# Altium PCB PCB.PcbDoc (part 2 of 2)
Units mm, origin at the board's own origin, x right, y up, seen from the top; angles counter-clockwise.
Board outline 100 x 100 mm, 2 copper layers (Top Layer, Bottom Layer); 45 components, 90 nets, 459 pads, 167 vias.
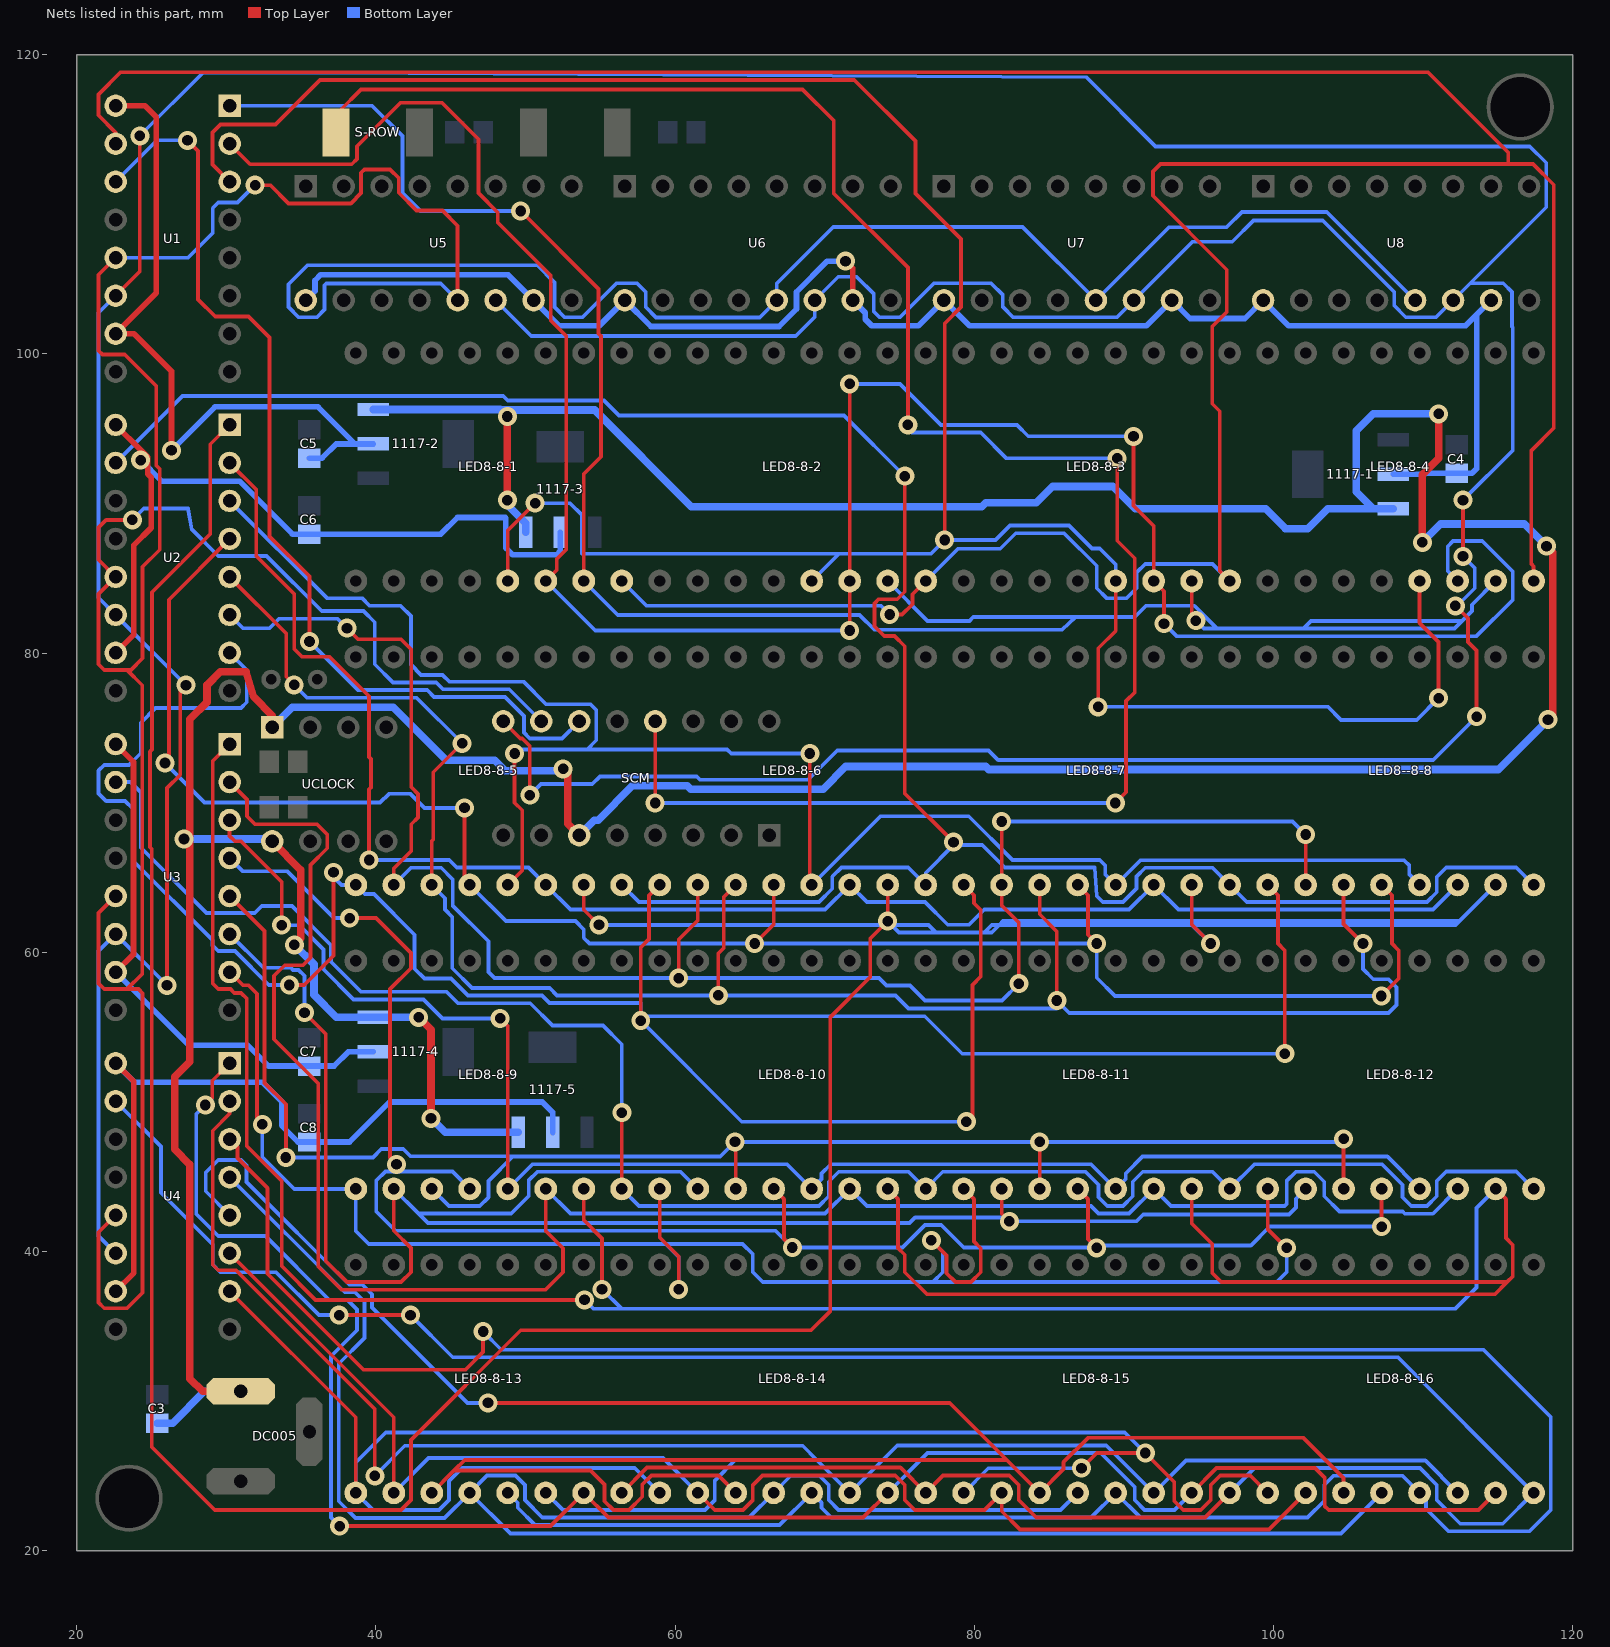
[diagram p2: the nets of this part, all layers, seen from the top]

## Via types
v1: diameter 1.27, hole 0.711, Top Layer to Bottom Layer, 167 vias

## Nets (pads, with @x,y where several pads share a name; then routed paths per layer and width w, separated by ;. In a path a pad name is that pad's centre, name@x,y a point inside that pad or via, vN(x,y) a via of type N, cw(c..) or ccw(c..) an arc to the next point about the centre after c; other vN are vias at no path point) (continued)
ROW5: LED8-8-1.5 LED8-8-2.5 LED8-8-3.5 LED8-8-4.5 U1.3 | length 176.5
  Top Layer w0.254: U1.3@30.226,111.506 29.083,112.649 29.083,114.808 29.616,115.341 33.299,115.341 36.271,118.313 71.984,118.313 76.073,114.224 76.073,110.719 79.121,107.671 79.121,103.124 78.029,102.032 v1(78.029,87.554) ; LED8-8-1.5@48.818,84.817 48.818,88.188 v1(50.648,90.018) ; v1(88.29,76.403) 88.29,80.315 89.458,81.483 LED8-8-3.5@89.458,84.817 ; LED8-8-4.5@109.778,84.817 109.778,82.017 111.049,80.747 v1(111.049,76.987)
  Bottom Layer w0.254: v1(50.648,90.018) 52.984,90.018 53.772,89.23 53.772,86.639 70.961,86.639 ; LED8-8-2.5@69.138,84.817 70.961,86.639 ; v1(88.29,76.403) 103.643,76.403 104.525,75.521 109.583,75.521 v1(111.049,76.987) ; LED8-8-3.5@89.458,84.817 89.458,85.929 88.392,86.995 87.871,86.995 86.347,88.519 82.398,88.519 81.432,87.554 v1(78.029,87.554) 77.114,86.639 70.961,86.639
ROW6: LED8-8-1.6 LED8-8-2.6 LED8-8-3.6 LED8-8-4.6 U1.2 | length 159.4
  Top Layer w0.254: U1.2@30.226,114.046 31.598,112.674 38.391,112.674 38.747,113.03 38.747,113.88 41.656,116.789 44.425,116.789 46.863,114.351 46.863,110.744 48.15,109.457 48.15,108.771 51.689,105.232 51.689,102.235 52.73,101.194 52.73,86.919 52.091,86.279 52.091,85.55 LED8-8-1.6@51.358,84.817 ; v1(71.678,81.509) LED8-8-2.6@71.678,84.817 ; LED8-8-2.6@71.678,84.817 v1(71.679,97.993) ; v1(90.653,94.488) 90.653,89.84 91.998,88.494 LED8-8-3.6@91.998,84.817 92.685,84.131 v1(92.685,81.966)
  Bottom Layer w0.254: LED8-8-1.6@51.358,84.817 54.667,81.509 v1(71.678,81.509) ; v1(71.679,97.993) 75.031,97.993 77.774,95.25 82.855,95.25 83.617,94.488 v1(90.653,94.488) ; v1(92.685,81.966) 93.523,81.128 113.589,81.128 116.002,83.541 116.002,85.446 113.963,87.484 112.014,87.484 111.658,87.128 111.658,85.477 LED8-8-4.6@112.318,84.817
ROW7: LED8-8-1.7 LED8-8-2.7 LED8-8-3.7 LED8-8-4.7 U1.1 | length 146.2
  Top Layer w0.254: v1(49.682,109.55) 54.889,104.343 54.889,101.346 55.042,101.194 55.042,93.116 53.898,91.973 LED8-8-1.7@53.898,84.817 ; LED8-8-3.7@94.538,84.817 94.538,82.449 v1(94.818,82.169)
  Bottom Layer w0.254: U1.1@30.226,116.586 39.751,116.586 41.783,114.554 41.783,110.744 42.977,109.55 v1(49.682,109.55) ; LED8-8-1.7@53.898,84.817 56.172,82.543 72.342,82.543 73.33,81.556 85.868,81.556 86.798,82.404 ; LED8-8-2.7@74.218,84.817 76.885,82.15 79.68,82.15 79.934,82.404 86.798,82.404 ; v1(94.818,82.169) 95.352,81.636 96.241,81.636 ; LED8-8-4.7@114.858,84.817 113.273,83.232 113.273,82.804 112.613,82.144 ; 86.798,82.404 90.735,82.404 90.735,82.486 90.817,82.486 91.491,83.16 94.717,83.16 95.263,82.614 96.241,81.636 ; 96.241,81.636 102.006,81.636 ; 102.006,81.636 102.514,82.144 112.613,82.144 ; 102.006,81.636 112.105,81.636 112.613,82.144
ROW8: LED8-8-1.8 LED8-8-2.8 LED8-8-3.8 LED8-8-4.8 U1.15 | length 235.6
  Top Layer w0.254: U1.15@22.606,114.046 22.606,114.808 21.463,115.951 21.463,117.348 22.936,118.821 110.338,118.821 115.697,113.462 115.697,112.7 ; v1(74.346,82.575) 75.184,82.575 75.87,83.261 75.87,83.929 LED8-8-2.8@76.758,84.817 ; LED8-8-3.8@97.078,84.817 96.418,85.477 96.418,96.159 95.91,96.667 95.91,101.829 96.889,102.807 96.889,105.625 91.948,110.566 91.948,112.192 92.456,112.7 115.697,112.7 ; LED8-8-4.8@117.398,84.817 117.398,85.802 117.246,85.954 117.246,93.548 118.745,95.047 118.745,111.303 117.348,112.7 115.697,112.7
  Bottom Layer w0.254: LED8-8-1.8@56.438,84.817 58.096,83.16 73.762,83.16 v1(74.346,82.575) ; LED8-8-2.8@76.758,84.817 78.917,86.976 81.744,86.976 82.779,88.011 86.011,88.011 88.189,85.833 88.189,84.328 88.849,83.668 90.195,83.668 90.855,84.328 90.855,85.375 91.44,85.96 95.935,85.96 LED8-8-3.8@97.078,84.817
ROW9: LED8-8-5.1 LED8-8-6.1 LED8-8-7.1 LED8--8-8.1 U2.7 | length 181.6
  Top Layer w0.254: v1(34.214,57.81) 35.219,57.81 37.167,59.759 v1(37.167,65.336) ; v1(57.709,55.423) 57.709,60.325 58.268,60.884 58.268,63.786 LED8-8-6.1@58.978,64.497 ; LED8-8-7.1@79.298,64.497 79.985,63.811 79.985,63.277 80.441,62.82 80.441,58.369 79.883,57.811 79.883,49.073 v1(79.477,48.666) ; LED8--8-8.1@99.618,64.497 100.305,63.811 100.305,60.579 100.762,60.122 v1(100.762,53.213)
  Bottom Layer w0.254: U2.7@30.226,80.01 31.369,78.867 31.369,76.708 30.988,76.327 25.273,76.327 24.279,75.333 24.279,73.301 23.495,72.517 21.844,72.517 21.463,72.136 21.463,70.612 21.971,70.104 23.241,70.104 23.749,69.596 23.749,66.139 29.083,60.805 29.083,60.452 29.464,60.071 30.582,60.071 32.842,57.81 v1(34.214,57.81) ; v1(37.167,65.336) 37.167,65.024 37.694,64.497 LED8-8-5.1@38.658,64.497 39.268,63.887 39.87,63.887 42.592,61.166 42.592,58.894 43.244,58.242 45.022,58.242 46.165,57.099 51.117,57.099 51.612,56.605 57.709,56.605 v1(57.709,55.423) ; v1(79.477,48.666) 64.465,48.666 v1(57.709,55.423) ; v1(100.762,53.213) 79.204,53.213 76.697,55.721 58.007,55.721 v1(57.709,55.423)
ROW10: LED8-8-5.2 LED8-8-6.2 LED8-8-7.2 LED8--8-8.2 U2.6 | length 121
  Top Layer w0.254: v1(38.075,81.661) 38.811,80.924 41.681,80.924 42.367,80.239 42.367,71.044 42.824,70.587 42.824,69.012 42.367,68.555 42.367,66.769 41.198,65.6 LED8-8-5.2@41.198,64.497 ; v1(60.249,58.268) 60.249,60.858 61.518,62.128 LED8-8-6.2@61.518,64.497 ; v1(81.838,68.739) LED8-8-7.2@81.838,64.497 81.838,63.12 82.982,61.976 v1(82.982,57.893) ; LED8--8-8.2@102.158,64.497 v1(102.158,67.869)
  Bottom Layer w0.254: U2.6@30.226,82.55 31.115,81.661 32.893,81.661 33.528,82.296 37.44,82.296 v1(38.075,81.661) ; LED8-8-5.2@41.198,64.497 42.341,65.64 44.367,65.64 45.135,64.872 45.135,63.12 47.523,60.731 47.523,58.674 47.93,58.268 v1(60.249,58.268) 73.637,58.268 74.139,57.766 75.711,57.766 76.708,56.769 81.858,56.769 v1(82.982,57.893) ; v1(81.838,68.739) 101.289,68.739 v1(102.158,67.869)
ROW11: LED8-8-5.3 LED8-8-6.3 LED8-8-7.3 LED8--8-8.3 U2.5 | length 129.8
  Top Layer w0.254: U2.5@30.226,85.09 34.011,81.305 34.011,78.41 v1(34.544,77.876) ; LED8-8-5.3@43.738,64.497 43.738,67.436 43.84,67.539 43.84,72.034 v1(45.771,73.965) ; v1(62.89,57.113) 62.89,59.903 63.261,60.273 63.261,63.7 LED8-8-6.3@64.058,64.497 ; LED8-8-7.3@84.378,64.497 84.378,62.535 85.522,61.392 v1(85.522,56.769) ; LED8--8-8.3@104.698,64.497 104.698,61.875 v1(105.994,60.579)
  Bottom Layer w0.254: v1(34.544,77.876) 35.406,77.014 42.722,77.014 v1(45.771,73.965) ; LED8-8-5.3@43.738,64.497 44.627,63.608 44.627,62.846 45.11,62.363 45.11,58.928 46.431,57.607 51.625,57.607 52.12,57.113 v1(62.89,57.113) 74.744,57.113 75.615,56.242 85.522,56.242 v1(85.522,56.769) 86.36,55.931 107.696,55.931 108.229,56.464 108.229,57.658 107.696,58.191 106.68,58.191 105.994,58.877 v1(105.994,60.579)
ROW12: LED8-8-5.4 LED8-8-6.4 LED8-8-7.4 LED8--8-8.4 U2.4 | length 126.8
  Top Layer w0.254: v1(25.908,72.644) 26.162,72.898 26.162,83.566 U2.4@30.226,87.63 ; v1(45.923,69.647) 45.923,64.852 LED8-8-5.4@46.278,64.497 ; v1(65.329,60.579) 66.598,61.848 LED8-8-6.4@66.598,64.497 ; LED8-8-7.4@86.918,64.497 87.605,63.811 87.605,61.163 v1(88.189,60.579) ; v1(107.213,57.074) 108.381,58.242 108.381,60.122 107.925,60.579 107.925,63.811 LED8--8-8.4@107.238,64.497
  Bottom Layer w0.254: v1(25.908,72.644) 28.55,70.002 40.284,70.002 40.869,70.587 42.316,70.587 43.256,69.647 v1(45.923,69.647) ; LED8-8-5.4@46.278,64.497 48.698,62.078 53.34,62.078 53.899,61.519 53.899,60.96 54.28,60.579 v1(65.329,60.579) v1(88.189,60.579) 88.189,58.293 89.408,57.074 v1(107.213,57.074)
ROW13: LED8-8-5.5 LED8-8-6.5 LED8-8-7.5 LED8--8-8.5 U2.3 | length 119.8
  Top Layer w0.254: LED8-8-5.5@48.818,64.497 49.784,65.463 49.784,69.484 49.276,69.992 v1(49.276,73.279) ; v1(69.012,73.279) 69.012,64.623 LED8-8-6.5@69.138,64.497
  Bottom Layer w0.254: U2.3@30.226,90.17 36.728,83.668 39.065,83.668 39.573,83.16 41.656,83.16 42.342,82.474 42.342,79.223 43.026,78.538 44.45,78.538 44.902,78.086 49.879,78.086 51.384,76.581 54.356,76.581 54.737,76.2 54.737,74.168 54.127,73.558 ; v1(49.276,73.279) 49.555,73.558 54.127,73.558 ; v1(69.012,73.279) 63.764,73.279 63.485,73.558 54.127,73.558 ; LED8-8-6.5@69.138,64.497 73.729,69.088 79.635,69.088 82.556,66.167 88.392,66.167 88.766,65.793 88.766,65.189 LED8-8-7.5@89.458,64.497 91.109,66.148 108.728,66.148 109.09,65.786 109.09,65.185 LED8--8-8.5@109.778,64.497
ROW14: LED8-8-5.6 LED8-8-6.6 LED8-8-7.6 LED8--8-8.6 U2.2 | length 110
  Top Layer w0.254: U2.2@30.226,92.71 32.004,90.932 32.004,86.487 34.544,83.947 34.544,80.264 35.052,79.756 36.906,79.756 39.548,77.114 39.548,73.05 39.675,72.923 39.675,71.018 39.548,70.891 v1(39.548,66.167)
  Bottom Layer w0.254: v1(39.548,66.167) 44.903,66.167 45.411,65.659 50.196,65.659 LED8-8-5.6@51.358,64.497 53.009,62.846 70.027,62.846 LED8-8-6.6@71.678,64.497 72.828,63.348 76.714,63.348 78.232,61.83 79.654,61.83 80.67,62.846 90.347,62.846 LED8-8-7.6@91.998,64.497 93.649,62.846 110.667,62.846 LED8--8-8.6@112.318,64.497
ROW15: LED8-8-5.7 LED8-8-6.7 LED8-8-7.7 LED8--8-8.7 U2.1 | length 262.4
  Top Layer w0.254: U2.1@30.226,95.25 28.931,93.955 28.931,87.96 25.031,84.061 25.031,73.545 24.892,73.406 24.892,67.032 25.019,66.905 25.019,26.924 29.235,22.708 41.681,22.708 42.342,23.368 42.342,27.381 49.682,34.722 69.088,34.722 70.383,36.017 70.383,55.677 73.05,58.344 73.05,60.935 73.075,60.935 v1(74.218,62.078) LED8-8-6.7@74.218,64.497 ; LED8-8-5.7@53.898,64.497 53.898,62.84 v1(54.915,61.824) ; LED8-8-7.7@94.538,64.497 94.538,61.85 v1(95.809,60.579)
  Bottom Layer w0.254: v1(54.915,61.824) 74.218,61.824 v1@74.472,61.824 ; v1(74.218,62.078) v1@74.472,61.824 ; v1(95.809,60.579) 94.564,61.824 ; LED8--8-8.7@114.858,64.497 112.439,62.078 ; v1@74.472,61.824 74.974,61.322 77.445,61.322 ; v1@74.472,61.824 76.943,61.824 77.445,61.322 ; 77.445,61.322 80.677,61.322 ; 80.677,61.322 81.178,61.322 81.68,61.824 ; 80.677,61.322 81.178,61.824 81.68,61.824 ; 81.68,61.824 94.564,61.824 ; 81.68,61.824 81.934,62.078 94.31,62.078 ; 94.31,62.078 112.439,62.078 ; 94.31,62.078 94.564,61.824 ; 94.564,61.824 112.185,61.824 112.439,62.078
ROW16: LED8-8-5.8 LED8-8-6.8 LED8-8-7.8 LED8--8-8.8 U2.15 | length 157.5
  Top Layer w0.254: v1(75.362,91.821) 75.362,84.099 74.854,83.591 73.609,83.591 73.33,83.312 73.33,81.788 73.984,81.134 74.676,81.134 75.362,80.448 75.362,70.612 v1(78.613,67.361)
  Bottom Layer w0.254: U2.15@22.606,92.71 27.076,97.18 48.52,97.18 48.818,96.882 55.261,96.882 56.258,95.885 71.298,95.885 v1(75.362,91.821) ; LED8-8-5.8@56.438,64.497 57.581,63.354 69.628,63.354 70.51,64.237 70.51,65.049 71.12,65.659 75.596,65.659 LED8-8-6.8@76.758,64.497 76.758,65.303 v1@78.613,67.158 ; v1(78.613,67.361) v1@78.613,67.158 ; LED8--8-8.8@117.398,64.497 116.236,65.659 111.557,65.659 110.922,65.024 110.922,64.008 110.268,63.354 98.221,63.354 LED8-8-7.8@97.078,64.497 95.935,65.64 91.44,65.64 90.855,65.055 90.855,64.261 89.948,63.354 88.589,63.354 88.189,63.754 88.062,65.659 82.042,65.659 80.543,67.158 v1@78.613,67.158
ROW17: LED8-8-9.1 LED8-8-10.1 LED8-8-11.1 LED8-8-12.1 U3.7 | length 119.6
  Top Layer w0.254: U3.7@30.226,58.674 31.115,57.785 31.496,57.785 32.055,57.226 32.055,48.844 v1(32.41,48.489) ; LED8-8-10.1@58.978,44.177 58.978,40.92 60.249,39.649 v1(60.249,37.465) ; v1(77.14,40.742) 78.155,39.726 78.155,38.539 78.74,37.954 79.787,37.954 80.441,38.608 80.441,40.209 79.985,40.665 79.985,43.491 LED8-8-11.1@79.298,44.177 ; LED8-8-12.1@99.618,44.177 99.618,41.504 v1(100.889,40.234)
  Bottom Layer w0.254: v1(32.41,48.489) 32.41,46.311 34.544,44.177 LED8-8-9.1@38.658,44.177 38.658,41.352 39.522,40.488 59.385,40.488 ; v1(60.249,37.465) 60.249,39.624 59.385,40.488 ; v1(77.14,40.742) 77.902,39.98 77.902,38.608 77.241,37.948 ; v1(100.889,40.234) 100.889,38.608 100.228,37.948 77.241,37.948 ; 59.385,40.488 64.516,40.488 65.202,39.802 65.202,38.608 65.862,37.948 77.241,37.948
ROW18: LED8-8-9.2 LED8-8-10.2 LED8-8-11.2 LED8-8-12.2 U3.6 | length 125.1
  Top Layer w0.254: v1(35.23,55.956) 36.652,54.534 36.652,39.362 38.066,37.948 41.681,37.948 42.341,38.608 42.341,40.234 41.198,41.377 LED8-8-9.2@41.198,44.177 ; LED8-8-11.2@81.838,44.177 81.838,42.52 v1(82.347,42.012)
  Bottom Layer w0.254: U3.6@30.226,61.214 32.483,58.957 34.323,58.957 34.461,58.819 34.831,58.819 35.23,58.42 v1(35.23,55.956) ; LED8-8-9.2@41.198,44.177 42.849,42.526 ; LED8-8-10.2@61.518,44.177 60.375,45.32 50.8,45.32 50.215,44.735 50.215,43.688 49.053,42.526 42.849,42.526 ; LED8-8-12.2@102.158,44.177 101.504,43.523 101.504,42.926 101.047,42.469 91.307,42.469 90.849,42.012 v1(82.347,42.012) 82.086,42.272 76.053,42.272 75.672,41.891 43.484,41.891 42.849,42.526
ROW19: LED8-8-9.3 LED8-8-10.3 LED8-8-11.3 LED8-8-12.3 U3.5 | length 122.1
  Top Layer w0.254: U3.5@30.226,63.754 32.563,61.417 32.563,51.257 33.985,49.835 v1(33.985,46.279) ; v1(64.008,47.32) 64.058,47.27 LED8-8-10.3@64.058,44.177 ; LED8-8-11.3@84.378,44.177 v1(84.378,47.32) ; LED8-8-12.3@104.698,44.177 v1(104.698,47.524)
  Bottom Layer w0.254: v1(33.985,46.279) 39.801,46.279 40.366,46.844 41.833,46.844 42.322,46.355 63.043,46.355 ; LED8-8-9.3@43.738,44.177 44.881,43.034 46.946,43.034 47.523,43.612 47.523,44.704 49.155,46.336 63.024,46.336 63.043,46.355 ; v1(104.698,47.524) 104.494,47.32 v1(84.378,47.32) v1(64.008,47.32) 63.043,46.355
ROW20: LED8-8-9.4 LED8-8-10.4 LED8-8-11.4 LED8-8-12.4 U3.4 | length 120.9
  Top Layer w0.254: v1(38.252,62.281) 40.005,62.281 42.342,59.944 42.342,58.928 40.945,57.531 40.945,46.253 v1(41.377,45.822) ; LED8-8-10.4@66.598,44.177 67.285,43.491 67.285,40.818 v1(67.843,40.259) ; LED8-8-11.4@86.918,44.177 87.605,43.491 87.605,40.818 v1(88.189,40.234) ; v1(107.238,41.655) LED8-8-12.4@107.238,44.177
  Bottom Layer w0.254: U3.4@30.226,66.294 31.115,65.405 34.087,65.405 37.211,62.281 v1(38.252,62.281) ; v1(41.377,45.822) 41.859,45.339 ; LED8-8-9.4@46.278,44.177 45.116,45.339 41.859,45.339 ; v1(107.238,41.655) 99.764,41.655 98.494,40.386 88.189,40.386 v1(88.189,40.234) 88.163,40.259 79.299,40.259 77.8,41.758 76.708,41.758 75.209,40.259 v1(67.843,40.259) 66.719,41.383 41.319,41.383 40.03,42.672 40.03,44.729 40.64,45.339 41.377,45.339 41.859,45.339
ROW21: LED8-8-9.5 LED8-8-10.5 LED8-8-11.5 LED8-8-12.5 U3.3 | length 104.2
  Top Layer w0.254: U3.3@30.226,68.834 30.226,67.767 30.582,67.412 30.988,67.412 33.706,64.694 v1(33.706,61.803) ; v1(48.31,55.575) 48.818,55.067 LED8-8-9.5@48.818,44.177
  Bottom Layer w0.254: v1(33.706,61.803) 34.886,61.803 36.5,60.189 36.5,58.858 38.513,56.845 43.18,56.845 44.45,55.575 v1(48.31,55.575) ; LED8-8-9.5@48.818,44.177 50.469,45.828 67.487,45.828 LED8-8-10.5@69.138,44.177 69.8,44.839 69.8,45.212 70.416,45.828 87.807,45.828 LED8-8-11.5@89.458,44.177 90.128,44.847 90.128,45.212 91.252,46.336 107.619,46.336 LED8-8-12.5@109.778,44.177
ROW22: LED8-8-9.6 LED8-8-10.6 LED8-8-11.6 LED8-8-12.6 U3.2 | length 132.9
  Top Layer w0.254: U3.2@30.226,71.374 31.394,70.206 31.394,69.088 31.928,68.555 36.068,68.555 36.754,67.869 36.754,66.954 35.624,65.824 35.624,59.632 35.123,59.131 33.909,59.131 33.198,58.42 33.198,54.178 36.144,51.232 36.144,38.989 37.694,37.44 51.333,37.44 52.501,38.608 52.501,40.209 51.358,41.352 LED8-8-9.6@51.358,44.177
  Bottom Layer w0.254: LED8-8-9.6@51.358,44.177 53.009,42.526 70.027,42.526 LED8-8-10.6@71.678,44.177 72.828,43.028 87.807,43.028 88.309,42.526 90.347,42.526 LED8-8-11.6@91.998,44.177 93.148,43.028 100.755,43.028 100.889,43.161 100.889,44.704 101.505,45.32 102.737,45.32 103.403,44.653 103.403,43.688 104.419,42.672 108.636,42.672 108.788,42.52 110.661,42.52 LED8-8-12.6@112.318,44.177
ROW23: LED8-8-9.7 LED8-8-10.7 LED8-8-11.7 LED8-8-12.7 U3.1 | length 216.1
  Top Layer w0.254: U3.1@30.226,73.914 29.095,72.783 29.095,57.9 29.464,57.531 30.277,57.531 30.531,57.277 30.988,57.277 31.369,56.896 31.369,47.041 33.706,44.704 33.706,39.014 35.966,36.754 v1(53.95,36.754) ; LED8-8-9.7@53.898,44.177 53.898,42.088 55.118,40.869 v1(55.118,37.465) ; LED8-8-10.7@74.218,44.177 74.905,43.491 74.905,40.234 75.362,39.776 75.362,38.608 76.835,37.135 114.808,37.135 115.621,37.948 ; LED8-8-11.7@94.538,44.177 94.538,41.86 95.91,40.488 95.91,38.557 96.52,37.948 115.621,37.948 ; LED8-8-12.7@114.858,44.177 115.545,43.491 115.545,40.894 116.002,40.437 116.002,38.329 115.621,37.948
  Bottom Layer w0.254: v1(53.95,36.754) 54.534,36.17 56.413,36.17 ; v1(55.118,37.465) 56.413,36.17 ; LED8-8-12.7@114.858,44.177 113.589,42.908 113.589,37.592 112.166,36.17 56.413,36.17
ROW24: LED8-8-9.8 LED8-8-10.8 LED8-8-11.8 LED8-8-12.8 U3.15 | length 125.6
  Top Layer w0.254: LED8-8-9.8@56.438,44.177 v1(56.439,49.276)
  Bottom Layer w0.254: U3.15@22.606,71.374 23.599,71.374 24.308,70.665 24.308,66.98 28.677,62.611 31.902,62.611 32.372,63.081 34.395,63.081 37.008,60.468 37.008,59.36 39.014,57.353 44.729,57.353 45.491,56.591 50.317,56.591 51.816,55.093 55.194,55.093 56.439,53.848 v1(56.439,49.276) ; LED8-8-9.8@56.438,44.177 57.581,43.034 69.628,43.034 70.282,43.688 70.282,44.653 70.949,45.32 75.615,45.32 LED8-8-10.8@76.758,44.177 77.901,45.32 87.446,45.32 88.315,44.451 88.315,43.619 88.9,43.034 89.947,43.034 90.601,43.688 90.601,44.653 91.269,45.32 95.935,45.32 LED8-8-11.8@97.078,44.177 98.729,45.828 107.258,45.828 108.635,44.451 108.635,43.619 109.22,43.034 110.267,43.034 110.921,43.688 110.921,44.704 111.556,45.339 116.236,45.339 LED8-8-12.8@117.398,44.177
ROW25: LED8-8-13.1 LED8-8-14.1 LED8-8-15.1 LED8-8-16.1 U4.7 | length 122.4
  Top Layer w0.254: U4.7@30.226,37.338 38.658,28.906 LED8-8-13.1@38.658,23.857 ; v1(87.173,25.502) 88.189,26.518 v1(91.44,26.518) 93.37,24.587 93.37,23.317 93.98,22.708 95.148,22.708 95.809,23.368 95.809,24.384 96.444,25.019 98.456,25.019 LED8-8-16.1@99.618,23.857
  Bottom Layer w0.254: LED8-8-14.1@58.978,23.857 57.308,25.527 45.771,25.527 44.882,24.638 44.882,23.368 44.221,22.708 39.808,22.708 LED8-8-13.1@38.658,23.857 38.658,25.88 40.667,27.889 90.068,27.889 v1(91.44,26.518) ; LED8-8-15.1@79.298,23.857 80.943,25.502 v1(87.173,25.502)
ROW26: LED8-8-13.2 LED8-8-14.2 LED8-8-15.2 LED8-8-16.2 U4.6 | length 90.3
  Top Layer w0.254: U4.6@30.226,39.878 41.198,28.906 LED8-8-13.2@41.198,23.857 ; LED8-8-14.2@61.518,23.857 62.661,22.714 64.548,22.714 65.202,23.368 65.202,24.384 65.837,25.019 74.727,25.019 75.362,24.384 75.362,23.368 76.022,22.708 80.689,22.708 LED8-8-15.2@81.838,23.857 81.838,22.632 83.058,21.412 99.713,21.412 LED8-8-16.2@102.158,23.857
  Bottom Layer w0.254: LED8-8-13.2@41.198,23.857 43.529,26.187 59.188,26.187 LED8-8-14.2@61.518,23.857
ROW27: LED8-8-13.3 LED8-8-14.3 LED8-8-15.3 LED8-8-16.3 U4.5 | length 156
  Top Layer w0.254: LED8-8-13.3@43.738,23.857 45.23,25.349 ; v1(47.498,29.87) 78.365,29.87 82.175,26.06 ; LED8-8-14.3@64.058,23.857 62.896,25.019 58.42,25.019 57.81,24.409 57.81,23.597 56.928,22.714 55.88,22.714 55.295,23.299 55.295,24.41 54.356,25.349 45.23,25.349 ; LED8-8-16.3@104.698,23.857 104.698,24.855 102.02,27.534 87.6,27.534 85.975,25.908 85.975,25.454 LED8-8-15.3@84.378,23.857 82.175,26.06 ; 45.23,25.349 45.942,26.06 82.175,26.06
  Bottom Layer w0.254: U4.5@30.226,42.418 28.626,44.018 28.626,45.263 29.464,46.101 30.988,46.101 31.357,45.732 31.357,44.64 38.227,37.77 39.116,37.77 39.751,37.135 39.751,36.246 46.126,29.87 v1(47.498,29.87)
ROW28: LED8-8-13.4 LED8-8-14.4 LED8-8-15.4 LED8-8-16.4 U4.4 | length 145.7
  Bottom Layer w0.254: U4.4@30.226,44.958 37.922,37.262 38.608,37.262 39.243,36.627 39.243,34.214 37.515,32.486 37.515,23.292 38.633,22.174 44.595,22.174 LED8-8-13.4@46.278,23.857 ; LED8-8-15.4@86.918,23.857 85.775,22.714 70.936,22.714 70.281,23.369 70.281,24.384 69.665,25 67.741,25 LED8-8-14.4@66.598,23.857 64.947,22.206 51.124,22.206 49.962,23.368 49.962,24.384 49.336,25.01 47.431,25.01 LED8-8-13.4@46.278,23.857 ; LED8-8-16.4@107.238,23.857 104.514,21.133 49.002,21.133 LED8-8-13.4@46.278,23.857
ROW29: LED8-8-13.5 LED8-8-14.5 LED8-8-15.5 LED8-8-16.5 U4.3 | length 187.4
  Top Layer w0.254: U4.3@30.226,47.498 30.742,46.982 30.742,46.25 32.766,44.226 32.766,38.506 39.192,32.08 45.974,32.08 47.168,33.274 v1(47.168,34.646)
  Bottom Layer w0.254: v1(47.168,34.646) 48.387,33.426 114.046,33.426 118.542,28.931 118.542,22.708 117.119,21.285 111.718,21.285 110.211,22.792 110.211,23.857 LED8-8-16.5@109.778,23.857 108.635,25 104.019,25 103.403,24.384 103.403,23.317 102.286,22.2 91.116,22.2 LED8-8-15.5@89.458,23.857 87.807,22.206 70.449,22.206 69.795,22.86 69.795,23.201 LED8-8-14.5@69.138,23.857 66.979,21.698 50.645,21.698 49.483,22.86 49.483,23.192 LED8-8-13.5@48.818,23.857
ROW30: LED8-8-13.6 LED8-8-14.6 LED8-8-15.6 LED8-8-16.6 U4.2 | length 130.4
  Top Layer w0.254: U4.2@30.226,50.038 30.226,49.2 29.095,48.069 29.095,39.104 29.464,38.735 30.651,38.735 39.929,29.457 v1(39.929,24.994)
  Bottom Layer w0.254: v1(39.929,24.994) 41.935,27 68.535,27 69.5,26.035 ; LED8-8-13.6@51.358,23.857 52.501,22.714 62.008,22.714 62.662,23.368 62.662,24.689 64.008,26.035 69.5,26.035 ; LED8-8-16.6@112.318,23.857 110.159,26.016 94.157,26.016 LED8-8-15.6@91.998,23.857 88.823,27.032 74.853,27.032 LED8-8-14.6@71.678,23.857 69.5,26.035
ROW31: LED8-8-13.7 LED8-8-14.7 LED8-8-15.7 LED8-8-16.7 U4.1 | length 126.5
  Top Layer w0.254: v1(28.6,49.784) 29.058,50.241 29.058,51.41 U4.1@30.226,52.578 ; v1(37.582,21.631) 51.672,21.631 LED8-8-13.7@53.898,23.857 55.549,22.206 72.567,22.206 LED8-8-14.7@74.218,23.857 ; LED8-8-15.7@94.538,23.857 96.208,25.527 102.775,25.527 103.429,24.873 103.429,22.987 103.702,22.714 113.715,22.714 LED8-8-16.7@114.858,23.857
  Bottom Layer w0.254: v1(28.6,49.784) 27.994,49.178 27.994,42.491 29.464,41.021 32.614,41.021 36.881,36.754 38.1,36.754 38.735,36.119 38.735,34.722 37.007,32.994 37.007,22.206 v1(37.582,21.631) ; LED8-8-14.7@74.218,23.857 76.885,26.524 88.461,26.524 90.729,24.256 90.729,23.368 91.383,22.714 93.395,22.714 LED8-8-15.7@94.538,23.857
ROW32: LED8-8-13.8 LED8-8-14.8 LED8-8-15.8 LED8-8-16.8 U4.15 | length 177.2
  Top Layer w0.254: v1(37.547,35.738) v1(42.316,35.738) ; LED8-8-13.8@56.438,23.857 58.134,25.552 75.063,25.552 LED8-8-14.8@76.758,23.857 77.92,25.019 82.347,25.019 82.982,24.384 82.982,23.368 84.15,22.2 95.421,22.2 LED8-8-15.8@97.078,23.857
  Bottom Layer w0.254: U4.15@22.606,50.038 25.629,47.015 25.629,43.917 29.095,40.45 29.095,39.116 29.603,38.608 33.325,38.608 36.195,35.738 v1(37.547,35.738) ; v1(42.316,35.738) 45.136,32.918 108.337,32.918 LED8-8-16.8@117.398,23.857 115.334,21.793 112.496,21.793 110.921,23.368 110.921,24.384 109.797,25.508 98.729,25.508 LED8-8-15.8@97.078,23.857
ROWBUTTON: S-ROW.2 SCM.13 | length 133.9
  Top Layer w0.254: S-ROW.2@37.332,114.808 37.592,114.808 37.592,116.256 39.014,117.678 68.529,117.678 70.612,115.595 70.612,110.719 75.565,105.766 v1(75.565,95.25) ; v1(58.674,69.977) SCM.13@58.674,75.438 ; v1(89.433,69.977) 90.145,70.688 90.145,76.784 90.729,77.368 90.729,86.335 89.56,87.503 v1(89.56,93.015)
  Bottom Layer w0.254: v1(58.674,69.977) v1(89.433,69.977) ; v1(75.565,95.25) 75.565,94.996 75.819,94.742 80.442,94.742 82.169,93.015 v1(89.56,93.015)
ROWD: SCM.11 U1.14 | length 66
  Top Layer w0.254: v1(27.407,114.275) 28.118,113.563 28.118,103.632 29.261,102.489 31.496,102.489 32.893,101.092 32.893,87.794 35.56,85.127 v1(35.56,80.772)
  Bottom Layer w0.254: U1.14@22.606,111.506 25.375,114.275 v1(27.407,114.275) ; v1(35.56,80.772) 38.81,77.522 43.434,77.522 43.892,77.064 48.641,77.064 49.911,75.794 49.911,74.676 50.292,74.295 52.451,74.295 SCM.11@53.594,75.438
SHCP: SCM.9 U1.11 U2.11 U3.11 U4.11 U5.11 U6.11 U7.11 U8.11 | length 382
  Top Layer w0.254: U1.11@22.606,103.886 24.217,105.497 v1(24.217,114.579) ; v1(26.035,57.785) 26.035,70.968 26.924,71.857 26.924,77.47 v1(27.305,77.851) ; SCM.9@48.514,75.438 49.657,74.295 49.784,74.295 50.292,73.787 v1(50.292,70.5) ; v1(112.166,83.16) 113.005,82.321 113.005,80.747 113.589,80.162 v1(113.589,75.743) ; v1(112.674,86.462) v1(112.674,90.221)
  Bottom Layer w0.254: U4.11@22.606,39.878 21.463,41.021 21.463,60.071 U3.11@22.606,61.214 v1(26.035,57.785) ; U1.11@22.606,103.886 21.463,102.743 21.463,83.693 U2.11@22.606,82.55 v1(27.305,77.851) ; v1(24.217,114.579) 28.434,118.796 36.525,118.796 87.503,118.491 92.126,113.868 117.145,113.868 118.237,112.776 118.237,109.804 113.157,104.724 ; U5.11@48.006,103.581 50.387,101.2 68.072,101.2 69.342,102.47 U6.11@69.342,103.581 70.917,105.156 72.136,105.156 73.291,104.001 73.291,102.819 73.66,102.45 75.044,102.45 77.318,104.724 81.128,104.724 81.915,103.937 81.915,103.124 82.589,102.45 89.547,102.45 U7.11@90.678,103.581 94.59,107.493 97.257,107.493 98.679,108.915 103.302,108.915 108.077,104.14 108.077,103.226 108.852,102.45 110.883,102.45 U8.11@112.014,103.581 113.157,104.724 ; v1(50.292,70.5) 51.029,71.237 54.468,71.237 54.986,71.755 61.448,71.755 61.676,71.526 68.885,71.526 70.841,73.482 80.966,73.482 81.601,72.847 110.693,72.847 v1(113.589,75.743) ; v1(112.166,83.16) 112.293,83.16 113.462,84.328 113.462,85.674 v1(112.674,86.462) ; v1(112.674,90.221) 116.002,93.548 116.002,101.778 115.951,101.829 115.951,104.14 115.367,104.724 113.157,104.724
STCP: SCM.10 U1.12 U2.12 U3.12 U4.12 U5.12 U6.12 U7.12 U8.12 | length 285.1
  Top Layer w0.254: U4.12@22.606,42.418 21.463,41.275 21.463,36.576 21.844,36.195 23.368,36.195 24.409,37.236 24.409,57.252 24.13,57.531 23.368,57.531 ; U3.12@22.606,63.754 21.463,62.611 21.463,57.912 21.844,57.531 23.368,57.531 ; U1.12@22.606,106.426 21.463,105.283 21.463,100.203 21.717,99.949 23.218,99.949 25.319,97.848 25.319,92.541 25.552,92.307 25.552,86.905 24.409,85.762 24.409,79.654 23.622,78.867 23.368,78.867 ; v1(23.724,88.9) 21.971,88.9 21.463,88.392 21.463,86.233 U2.12@22.606,85.09 21.463,83.947 21.463,79.248 21.844,78.867 23.368,78.867 ; v1(31.928,111.277) 32.944,111.277 34.163,110.058 38.329,110.058 39.014,110.744 39.014,112.104 39.243,112.332 40.957,112.332 41.529,111.76 41.529,110.769 42.723,109.576 44.45,109.576 45.466,108.56 U5.12@45.466,103.581 ; 23.368,57.531 24.384,58.547 24.384,77.851 23.368,78.867
  Bottom Layer w0.254: U1.12@22.606,106.426 27.444,106.426 29.095,108.077 29.095,109.74 29.464,110.109 30.759,110.109 v1(31.928,111.277) ; v1(23.724,88.9) 24.486,89.662 27.444,89.662 27.698,88.253 29.464,86.487 32.699,86.487 36.382,82.804 39.176,82.804 39.929,82.052 39.929,79.248 41.147,78.03 44.042,78.03 44.494,77.578 48.914,77.578 SCM.10@51.054,75.438 ; U5.12@45.466,103.581 44.335,104.712 36.703,104.712 36.576,104.585 36.576,102.958 36.068,102.45 34.837,102.45 34.163,103.124 34.163,104.648 35.433,105.918 50.8,105.918 51.943,104.775 51.943,103.124 52.617,102.45 53.809,102.45 56.083,104.724 57.455,104.724 58.039,104.14 58.039,103.124 58.725,102.438 65.659,102.438 U6.12@66.802,103.581 66.802,104.704 70.581,108.483 83.236,108.483 U7.12@88.138,103.581 93.015,108.458 96.876,108.458 97.904,109.487 103.569,109.487 U8.12@109.474,103.581
V3-1: 1117-1.2 C4.1 U5.10 U5.16 U6.10 U6.16 U7.10 U7.16 U8.10 U8.16 | length 109.5
  Top Layer w0.381: v1(71.399,106.197) 71.882,105.715 U6.10@71.882,103.581
  Bottom Layer w0.381: U5.16@35.306,103.581 35.927,104.203 35.927,104.902 36.309,105.284 48.843,105.284 U5.10@50.546,103.581 52.249,101.879 54.939,101.879 U6.16@56.642,103.581 58.395,101.829 66.954,101.829 68.123,102.997 68.123,104.14 70.18,106.197 v1(71.399,106.197) ; U6.10@71.882,103.581 72.719,102.744 72.719,102.311 73.152,101.879 76.275,101.879 U7.16@77.978,103.581 79.681,101.879 91.515,101.879 U7.10@93.218,103.581 94.437,102.362 98.095,102.362 U8.16@99.314,103.581 101.017,101.879 112.851,101.879 113.589,102.616 ; 1117-1.2@108.006,91.948 110.084,91.948 110.15,92.014 C4.1@112.268,92.014 113.284,92.014 113.589,92.319 113.589,102.616 ; U8.10@114.554,103.581 113.589,102.616
V3-2: 1117-2.2 C5.1 U1.10 U1.16 | length 47.9
  Top Layer w0.381: U1.16@22.606,116.586 24.563,116.586 25.325,115.824 25.325,104.065 U1.10@22.606,101.346 23.825,101.346 26.34,98.831 v1(26.34,93.548)
  Bottom Layer w0.381: v1(26.34,93.548) 29.248,96.456 36.131,96.456 38.608,93.98 ; C5.1@35.56,93.03 36.401,93.03 37.351,93.98 38.608,93.98 ; 1117-2.2@39.822,93.98 38.608,93.98
V3-3: 1117-3.2 C6.1 U2.10 U2.16 | length 52
  Top Layer w0.381: U2.10@22.606,80.01 23.825,81.229 23.825,87.214 24.981,88.37 24.981,91.736 24.747,91.969 24.747,92.888 24.747,93.109 24.625,93.231 24.282,93.574 ; U2.16@22.606,95.25 24.282,93.574 ; v1(24.282,92.888) 24.282,93.574
  Bottom Layer w0.381: v1(24.282,92.888) 25.679,91.491 30.886,91.491 34.427,87.95 C6.1@35.56,87.95 44.338,87.95 45.453,89.065 48.642,89.065 48.693,89.013 48.693,87.017 49.147,86.563 52.07,86.563 52.324,86.817 1117-3.2@52.324,88.082
V3-4: 1117-4.2 C7.1 U3.10 U3.16 | length 36.4
  Top Layer w0.381: U3.10@22.606,58.674 23.801,59.869 23.801,72.719 U3.16@22.606,73.914
  Bottom Layer w0.381: U3.10@22.606,58.674 27.507,53.773 31.445,53.773 32.828,52.39 C7.1@35.56,52.39 37.211,52.39 38.161,53.34 1117-4.2@39.822,53.34
V3-5: 1117-5.2 C8.1 U4.10 U4.16 | length 51.3
  Top Layer w0.381: U4.10@22.606,37.338 23.825,38.557 23.825,51.359 U4.16@22.606,52.578
  Bottom Layer w0.381: U4.16@22.606,52.578 23.876,51.308 32.425,51.308 33.7,50.033 33.7,48.408 34.798,47.31 C8.1@35.56,47.31 38.242,47.31 40.922,49.99 51.127,49.99 51.816,49.301 1117-5.2@51.816,47.95
VCC: 1117-1.3 1117-2.3 1117-3.3 1117-4.3 1117-5.3 C3.1 DC005.1 SCM.6 UCLOCK.1 UCLOCK.8 | length 323.3
  Top Layer w0.508: v1(27.178,67.564) v1@27.571,67.564 ; DC005.1@30.96,30.64 28.415,30.64 27.571,31.484 27.571,45.804 26.555,46.82 26.555,51.665 27.571,52.681 v1@27.571,67.564 ; UCLOCK.8@33.071,67.412 34.989,65.494 34.989,60.922 v1(34.557,60.49) ; UCLOCK.1@33.071,75.032 33.071,75.819 31.826,77.064 31.318,78.74 29.591,78.74 28.712,77.861 28.712,76.72 27.571,75.579 v1@27.571,67.564 ; v1(42.861,55.64) 43.688,54.813 v1(43.688,48.895) ; v1(48.793,90.221) v1(48.793,95.809) ; v1(52.527,72.263) 52.832,71.958 52.832,68.58 SCM.6@53.594,67.818 ; v1(109.957,87.401) 109.957,91.923 111.049,93.015 v1(111.049,95.987) ; v1(118.262,87.147) 118.669,86.741 118.669,75.844 v1(118.364,75.54)
  Bottom Layer w0.508: C3.1@25.4,28.514 26.416,28.514 28.542,30.64 DC005.1@30.96,30.64 ; v1(27.178,67.564) 32.918,67.564 UCLOCK.8@33.071,67.412 ; UCLOCK.1@33.071,75.032 34.417,76.378 41.148,76.378 44.704,72.822 47.955,72.822 48.641,72.136 52.4,72.136 v1(52.527,72.263) ; v1(34.557,60.49) 35.865,59.182 35.865,57.143 37.368,55.64 1117-4.3@39.822,55.64 v1(42.861,55.64) ; 1117-2.3@39.822,96.28 48.322,96.28 ; v1(43.688,48.895) 44.628,47.955 49.516,47.955 1117-5.3@49.516,47.95 ; v1(48.793,90.221) 48.793,89.902 50.024,88.671 1117-3.3@50.024,88.082 ; v1(48.793,95.809) 48.322,96.28 ; SCM.6@53.594,67.818 54.61,68.834 54.864,68.834 57.15,71.12 60.813,71.12 61.041,70.891 69.901,70.891 71.425,72.415 80.763,72.415 80.966,72.212 115.036,72.212 v1(118.364,75.54) ; 1117-1.3@108.006,89.648 106.68,89.648 ; v1(109.957,87.401) 111.182,88.627 116.783,88.627 v1(118.262,87.147) ; v1(111.049,95.987) 106.68,95.987 105.537,94.844 105.537,90.791 106.68,89.648 ; 48.322,96.28 48.793,96.247 54.626,96.247 61.084,89.789 80.505,89.789 80.759,90.043 84.15,90.043 85.242,91.135 89.271,91.135 90.763,89.643 99.486,89.643 100.813,88.316 102.3,88.316 103.632,89.648 106.68,89.648
pads on no net: 1117-1.4 1117-2.4 1117-3.4 1117-4.4 1117-5.4 SCM.4 SCM.5 SCM.7 SCM.15 SCM.16 U4.9 U8.9

## Polygon pours and split planes (outlines as drawn)
GND on Top Layer "Top Layer-No Net" (solid): 20.853,119.38 20.803,119.329 20.803,20.396 119.38,20.396 119.38,119.329 20.803,119.329 20.803,119.304
GND on Bottom Layer "BLayer-No Net" (solid): 20.904,119.329 119.126,119.329 119.177,119.38 119.329,119.228 119.329,20.447 20.853,20.447 20.904,20.498 20.904,119.329

## Keep-outs
Keep-Out Layer:
  lines w0.254: 20.803,27 20.803,20.32 26.924,20.32 ; 20.828,26.975 20.828,119.355 21.057,119.355 21.082,119.329 21.133,119.38 21.184,119.329 113.894,119.329 ; 26.975,20.371 119.329,20.371 119.38,20.32 119.38,112.979 119.38,114.046 ; 113.995,119.355 119.355,119.355 119.38,119.329 119.38,114.071

## Silkscreen, mask and mechanical layers (free items; w line width, h text height)
Bottom Overlay:
  text "By Zhang Di" at 117.094,31.242 h5.08
  text "2018.02.11" at 62.586,30.683 h2.54